# Altium PCB properpcb.PcbDoc
Units mil, origin at the board's own origin, x right, y up, seen from the top; angles counter-clockwise.
Board outline 1407.67 x 3602.55 mil, 2 copper layers (Top Layer, Bottom Layer); 28 components, 20 nets, 78 pads, 1 vias.
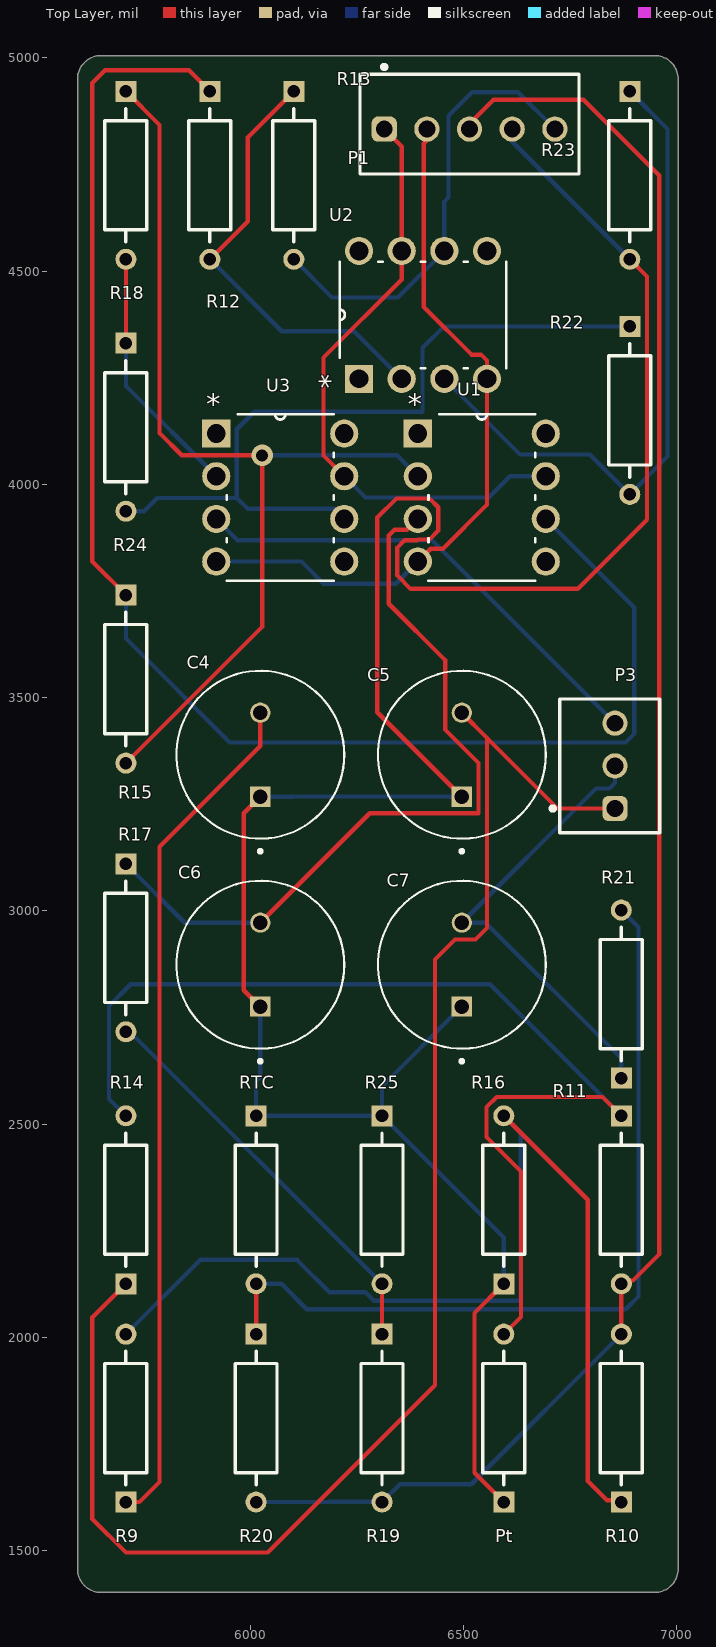
[diagram p0: Top Layer view]
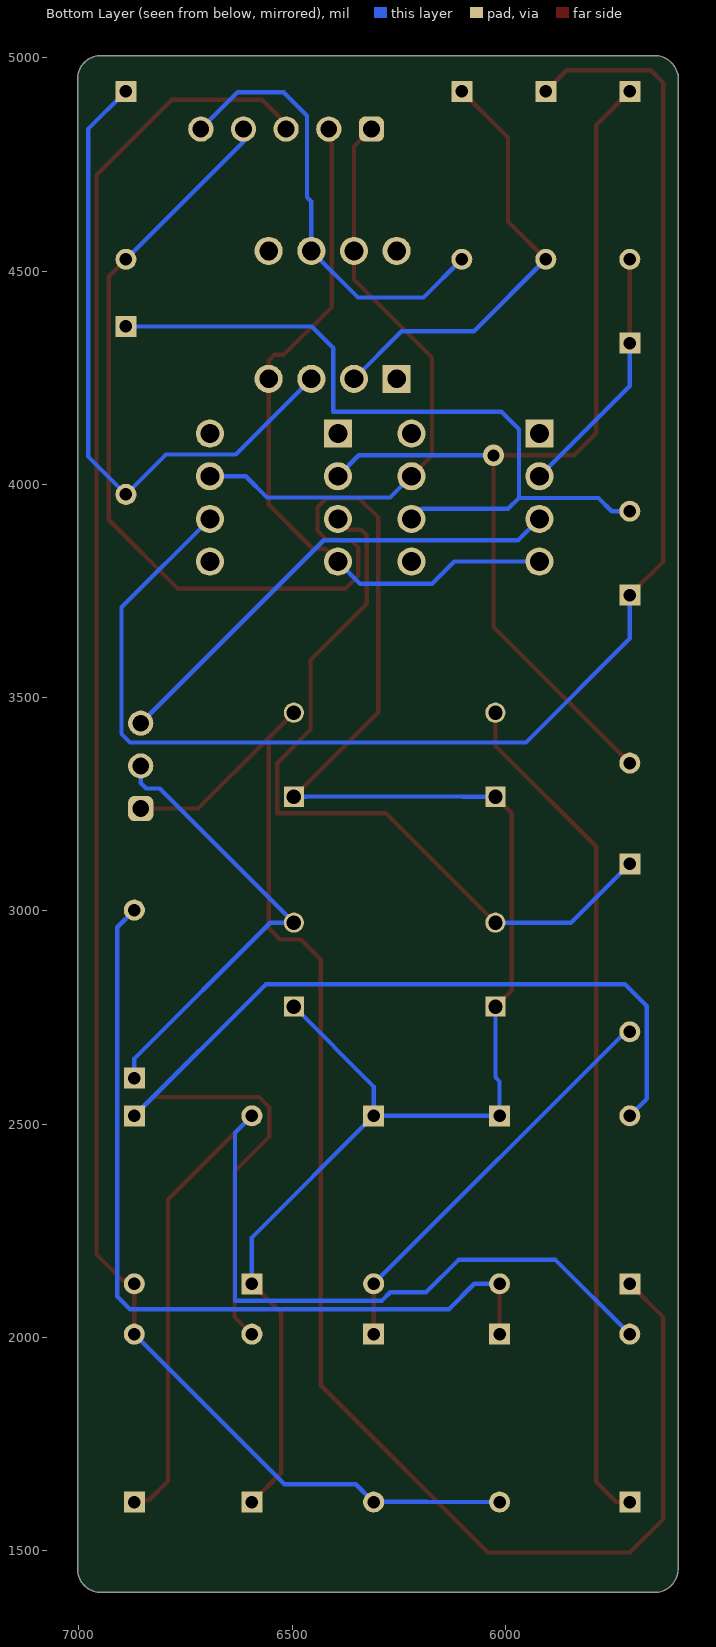
[diagram p1: Bottom Layer view, seen from below]
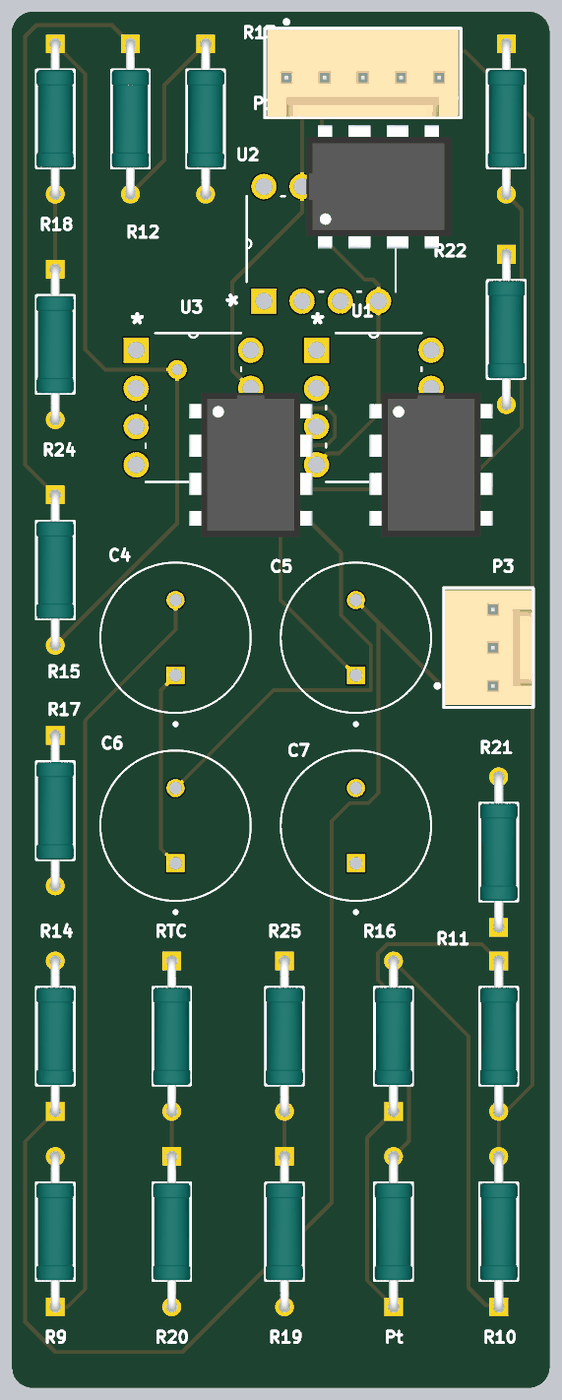
[diagram p2: 3D render of the assembled board from above, using the file's embedded part models]

## Layer stack, top to bottom
Top Solder: solder mask 0.4, Solder Resist, Dk 3.5
Top Layer: signal copper 1.4
Dielectric 1: dielectric 12.6, FR-4, Dk 4.8
Bottom Layer: signal copper 1.4
Bottom Solder: solder mask 0.4, Solder Resist, Dk 3.5

## Board outline
5595.38,1457.48 ccw(c5650.39,1457.48) 5650.39,1402.47 6948.03,1402.47 ccw(c6948.03,1457.48) 7003.05,1457.48 7003.05,4950 ccw(c6948.03,4950) 6948.03,5005.02 5650.39,5005.02 ccw(c5650.39,4950) 5597.36,4964.62 5595.38,4960.63

## Design rules (kind name [scope] priority, off if disabled: settings)
Clearance [All] p1: gap=10 ignorepadtopadclearanceinfootprint=FALSE
PolygonConnect [All] p1: connectstyle=Relief reliefconductorwidth=10 reliefentries=4 polygonreliefangle="90 Angle" airgapwidth=10
RoutingVias [All] p1: holewidth=28 width=50 viastyle="Through Hole" minholewidth=28 minwidth=50 maxholewidth=28 maxwidth=50
SolderMaskExpansion [All] p1: expansion=4 istentingtop=FALSE
Width [All] p1: maxlimit=10 minlimit=10 preferedwidth=10
30 further rules are at their usual default settings.

## Components (designator, comment, footprint, x,y, rotation, side; value= is the part's Value field where it differs from the comment)
C4 "10uF" CAPPRD500W60D1000H1700 6023.62,3366.14 r90 top
C5 "10uF" CAPPRD500W60D1000H1700 6496.06,3366.14 r90 top
C6 "10uF" CAPPRD500W60D1000H1700 6023.62,2874.02 r90 top
C7 "10uF" CAPPRD500W60D1000H1700 6496.06,2874.02 r90 top
P1 "61900511121" 61900511121 6514.17,4844.49 r180 top
P3 "61900311121" 61900311121 6843.19,3340 r270 top
Pt "10" FP-MRS25-MFG 6594.49,1811.02 r90 top
R9 "1k" FP-MRS25-MFG 5708.66,1811.02 r90 top
R10 "100" FP-MRS25-MFG 6870.08,1811.02 r90 top
R11 "100" FP-MRS25-MFG 6870.08,2322.83 r270 top
R12 "10k" FP-MRS25-MFG 5905.51,4724.41 r270 top
R13 "10k" FP-MRS25-MFG 6102.36,4724.41 r270 top
R14 "1k" FP-MRS25-MFG 5708.66,2322.83 r90 top
R15 "10k" FP-MRS25-MFG 5708.66,3543.31 r270 top
R16 "100" FP-MRS25-MFG 6594.49,2322.83 r90 top
R17 "1k" FP-MRS25-MFG 5708.66,2913.39 r270 top
R18 "6.6k" FP-MRS25-MFG 5708.66,4724.41 r270 top
R19 "10K" FP-MRS25-MFG 6309.06,1811.02 r270 top
R20 "10" FP-MRS25-MFG 6013.78,1811.02 r270 top
R21 "1k" FP-MRS25-MFG 6870,2805 r90 top
R22 "10k" FP-MRS25-MFG 6889.76,4173.23 r270 top
R23 "10k" FP-MRS25-MFG 6889.76,4724.41 r270 top
R24 "10k" FP-MRS25-MFG 5708.66,4133.86 r270 top
R25 "10K" FP-MRS25-MFG 6309.06,2322.83 r270 top
RTC "10K" FP-MRS25-MFG 6013.78,2322.83 r270 top
U1 "AD744KRZ-REEL7" DIP254P762X444-8 6692.91,3818.9 r0 top
U2 "AD744KRZ-REEL7" DIP254P762X444-8 6555.12,4547.24 r90 top
U3 "AD744KRZ-REEL7" DIP254P762X444-8 6220.47,3818.9 r0 top

## Footprints (in the part's own frame and the unit in brackets; to place one, negate y for a bottom-side part, rotate by r counter-clockwise, add the part's x,y. Pads: shape width x height; smd on the part's side, far side on the other; paste and mask are expansions set on the pad)
61900311121 [mm] "2.54mm Male Locking Header, 3p"
  rrect50% 1.5x1.5 hole 1: 1(2.54,0.3)
  round 1.5 hole 1: 2(0,0.3) 3(-2.54,0.3)
  silkscreen extent -3.98,-3.52 3.98,2.97, body extent -3.81,-2.9 3.81,2.9, height 11.53
61900511121 [mm] "2.54mm Male Locking Header, 5p"
  rrect50% 1.5x1.5 hole 1: 1(5.08,0.3)
  round 1.5 hole 1: 2(2.54,0.3) 3(0,0.3) 4(-2.54,0.3) 5(-5.08,0.3)
  silkscreen extent -6.52,-3.52 6.52,2.98, body extent -6.35,-2.9 6.35,2.9, height 11.53
CAPPRD500W60D1000H1700 [mm]
  rect 1.2x1.2 / inner round 1.2 / far side rect 1.2x1.2 hole 0.85: 1(-2.5,0)
  round 1.2 hole 0.85: 2(2.5,0)
  silkscreen extent -5.85,-5 5,5
DIP254P762X444-8 [mil]
  rect 66x66 / inner round 66 / far side rect 66x66 hole 44: 1(-300,300)
  round 66 hole 44: 2(-300,200) 3(-300,100) 4(-300,0) 5(0,0) 6(0,100) 7(0,200) 8(0,300)
  silkscreen extent -275,-45 -25,345, body extent -162,-189 162,189, height 210
FP-MRS25-MFG [mm]
  rect 1.25x1.25 hole 0.75 paste-2539.97 mask+0: 1(-5,0)
  round 1.25 hole 0.75 paste-2539.97 mask+0: 2(5,0)
  silkscreen extent -3.97,-1.25 3.97,1.25, body extent -5.72,-1.35 5.72,1.35, height 0.25

## Part data
C4 C5 C6 C7: library part B41858C5477M000, "470 ÂµF 25 V Aluminum Electrolytic Capacitors Radial, Can 118mOhm @ 10kHz 5000 Hrs @ 105Â°C", Package=None, Check_prices=https://www.snapeda.com/parts/B41858C5477M000/EPCOS/view-part/?ref=eda, MF=EPCOS, MP=B41858C5477M000, SnapEDA_Link=https://www.snapeda.com/parts/B41858C5477M000/EPCOS/view-part/?ref=snap
P1: library part CMP-1502-00587-2, Color=Beige, Contact Resistance=20mΩ, Current Rating=3A, Flammability Rating="UL94 V-0", Insulation Resistance=1GΩ, Max Operating Temperature=105°C, Min Operating Temperature=-40°C, Operating Supply Voltage=250V, Connector Type="Male Pin", Contact Gender=Male, Contact Material=Copper, Contact Mating Length=7.493mm, Contact Plating=Tin, Fastening Type=Friction, Gender=Male, Height=12.5mm, Housing Material=Nylon, Lead Free="Lead Free", Lead Pitch=2.54mm, Length=12.7mm, Mount="Through Hole", NexarPartId=18818230, Number of Contacts=5, Number of Pins=5, Number of Positions=5, Number of Rows=1, Orientation=Vertical, Packaging=Bulk, Pitch=2.54mm, REACH SVHC=Unknown, RoHS=Compliant, Termination="Through Hole", Voltage Rating=250V, Width=12.74mm
P3: library part CMP-1502-00585-2, Color=Beige, Contact Resistance=20mΩ, Current Rating=3A, Flammability Rating="UL94 V-0", Insulation Resistance=1GΩ, Max Operating Temperature=105°C, Min Operating Temperature=-40°C, Operating Supply Voltage=250V, Connector Type="Male Pin", Contact Gender=Male, Contact Material=Copper, Contact Mating Length=7.493mm, Contact Plating=Tin, Fastening Type=Friction, Gender=Male, Height=12.5mm, Housing Material=Nylon, Lead Pitch=2.54mm, Length=7.62mm, Mount="Through Hole", NexarPartId=18818222, Number of Contacts=3, Number of Pins=3, Number of Positions=3, Number of Rows=1, Orientation=Vertical, Packaging=Bulk, Pitch=2.54mm, REACH SVHC=Unknown, RoHS=Compliant, Termination="Through Hole", Voltage Rating=250V, Width=7.66mm
Pt R9 R10 R11 R12 R13 R14 R15 R16 R17 R18 R19 R20 R21 R22 R23 R24 R25 RTC: library part CMP-00030-42757237-1, "MRS25000C1000FRP00 Resistor, 100 Ohm, ± 1%, 600 mW, Axial Leaded, Metal Film (Thin Film), Professional", Case/Package=Axial, Max Operating Temperature=155°C, Max Power Dissipation=600mW, Min Operating Temperature=-55°C, Resistance=100Ω, Temperature Coefficient=50ppm/°C, Tolerance=1%, Voltage Rating=350V, Composition="Metal Film, Thin Film", Contact Plating=Tin, Diameter=2.5mm, Lead Diameter=600µm, Lead Free="Lead Free", Length=6.5mm, Military Standard=Not, Mount="Through Hole", NexarPartId=42757237, Number of Pins=2, Number of Terminations=2, Packaging="Tape & Reel (TR)", Power Rating=600mW, Radiation Hardening=No, REACH SVHC=Unknown, RoHS=Compliant, Schedule B="8533210090, 8533210090", Termination=Axial, Voltage Rating (DC)=350V, Width=2.5mm
U1 U2 U3: "Precision, 500 ns Settling BiFET Op Amp", Package=None, Availability=Unavailable, MP=AD744KRZ-REEL7, Price=None

## Via types
v1: diameter 50, hole 28, Top Layer to Bottom Layer, 1 vias

## Nets (pads, with @x,y where several pads share a name; then routed paths per layer and width w, separated by ;. In a path a pad name is that pad's centre, name@x,y a point inside that pad or via, vN(x,y) a via of type N, cw(c..) or ccw(c..) an arc to the next point about the centre after c; other vN are vias at no path point)
5V: P1.3 R10.2 R11.2 R19.2 R20.2 | length 4338.6
  Top Layer w10: P1.3 6514.17,4845.32 6570.43,4901.57 6781.5,4901.57 6958.66,4724.41 6958.66,2194.88 6897.27,2133.49 6877.58,2133.49 R11.2 R10.2
  Bottom Layer w10: R20.2 6183.17,1614.17 6184,1615 6308.23,1615 R19.2 6350.88,1656 6518.2,1656 R10.2
+VSS: P1.1 U1.7 U2.7 U3.7 | length 1440.4
  Top Layer w10: U3.7 6172,4067.37 6172,4297 6355.12,4480.12 U2.7 6355.12,4791.73 P1.1
  Bottom Layer w10: U3.7 6270.37,3969 6559.1,3969 6609,4018.9 U1.7
-VSS: P1.2 U1.4 U2.4 U3.4 | length 1690.5
  Top Layer w10: U1.4 6423.11,3849.1 6451.81,3849.1 6555.12,3952.41 U2.4 6555.12,4290 6541.12,4304 6519,4304 6407,4416 6407,4799 6414.17,4806.17 P1.2
  Bottom Layer w10: U3.4 6120.1,3818.9 6172,3767 6341.01,3767 U1.4
GND: C4.1 C5.1 C6.1 C7.1 P1.4 Pt.1 R16.1 R23.2 R25.1 RTC.1 | length 5817
  Top Layer w10: C6.1 5985,2814.21 5985,3229.09 C4.1 ; C5.1 6298,3465.78 6298,3922 6343,3967 6420,3967 6440.91,3946.09 6440.91,3891.81 6420,3870.9 6392.91,3870.9 6391.01,3869 6362,3869 6344.91,3851.91 6344.91,3786.09 6376,3755 6768,3755 6930,3917 6930,4487.32 R23.2 ; Pt.1 6525.59,1683.07 6525.59,2057.09 R16.1
  Bottom Layer w10: C6.1 6023.62,2610 6013.78,2600.16 RTC.1 R25.1 ; C4.1 6100.72,3267.72 6101,3268 6466.72,3268 6467,3267.72 C5.1 ; C7.1 6309.06,2588.58 R25.1 ; R16.1 6594.49,2234.25 R25.1 ; P1.4 6614.17,4803.15 R23.2
NetC4_2: C4.2 R9.1 | length 1999.3
  Top Layer w10: R9.1 5740.17,1614.17 5787.4,1661.4 5787.4,3150.46 6023.62,3386.68 C4.2
NetC5_2: C5.2 P3.1 R14.1 | length 3630.1
  Top Layer w10: R14.1 5629.92,2047.24 5629.92,1574.8 5708.66,1496.06 6041.06,1496.06 6433,1888 6433,2886 6480,2933 6528,2933 6555,2960 6555,3405.63 ; C5.2 6555,3405.63 ; P3.1 6720.63,3240 6555,3405.63
NetC6_2: C6.2 R17.1 U1.3 | length 1811.8
  Top Layer w10: C6.2 6280.18,3229 6535,3229 6535,3347 6457,3425 6457,3588 6324.91,3720.09 6324.91,3880 6338.28,3893.37 6367.38,3893.37 U1.3
  Bottom Layer w10: R17.1 5846.46,2972.44 C6.2
NetC7_2: C7.2 P3.2 R21.1 | length 1086.3
  Bottom Layer w10: P3.2 6855,3300 6842,3287 6810.62,3287 C7.2 6551.56,2972.44 6870,2654 R21.1
NetP1_5: P1.5 R13.2 U2.6 | length 1063.7
  Bottom Layer w10: R13.2 6191.92,4438 6345.87,4438 U2.6 6455.12,4663.12 6465,4673 6465,4864 6520,4919 6627.85,4919 P1.5
NetP3_3: P3.3 U3.3 | length 1132.9
  Bottom Layer w10: U3.3 5970.37,3869 6426,3869 P3.3
NetPt_2: Pt.2 R11.1 R14.2 | length 2550.5
  Top Layer w10: Pt.2 6635,2048.39 6635,2389 6554,2470 6554,2540 6578,2564 6825.76,2564 R11.1
  Bottom Layer w10: R14.2 5669,2559.35 5669,2777 5720,2828 6561.76,2828 R11.1
NetR9_2: R9.2 R10.1 R16.2 | length 2523.8
  Top Layer w10: R16.2 6791.34,2322.83 6791.34,1663.39 6836.33,1618.39 6865.86,1618.39 R10.1
  Bottom Layer w10: R9.2 5882.79,2182 6110,2182 6186,2106 6270,2106 6289.62,2086.38 6634.1,2086.38 6634.1,2480.08 R16.2
NetR12_1: R12.1 R15.1 U1.6 | length 3533.5
  Top Layer w10: R15.1 5629.92,3818.9 5629.92,4940.94 5659.45,4970.47 5856.3,4970.47 R12.1
  Bottom Layer w10: R15.1 5708.66,3638.34 5952,3395 6880,3395 6900,3415 6900,3711.81 U1.6
NetR12_2: R12.2 R13.1 U2.2 | length 1041
  Top Layer w10: R12.2 5994.09,4616.14 5994.09,4812.99 R13.1
  Bottom Layer w10: R12.2 6074.07,4359 6243.36,4359 U2.2
NetR15_2: R15.2 R18.1 U1.2 | length 2335.1
  Top Layer w10: R15.2 6028,3665.79 v1(6028,4068) 5839.4,4068 5787.4,4120 5787.4,4842.52 R18.1
  Bottom Layer w10: v1(6028,4068) 6343.81,4068 U1.2
NetR17_2: R17.2 R19.1 R25.2 | length 963.1
  Top Layer w10: R19.1 R25.2
  Bottom Layer w10: R17.2 5718.5,2716.54 R25.2
NetR18_2: R18.2 R24.1 U3.2 | length 596.4
  Top Layer w10: R24.1 R18.2
  Bottom Layer w10: R24.1 5708.66,4230.71 U3.2
NetR20_1: R20.1 R21.2 RTC.2 | length 1973.9
  Top Layer w10: R20.1 6014,2008.09 6014,2125.76 RTC.2
  Bottom Layer w10: RTC.2 6073.02,2125.98 6132.62,2066.38 6880.38,2066.38 6910,2096 6910,2961.85 R21.2
NetR22_1: R22.1 R24.2 U3.6 | length 1815
  Bottom Layer w10: R24.2 5751.01,3937.01 5782,3968 5968.47,3968 ; U3.6 6196.37,3943 5993.47,3943 5968.47,3968 ; R22.1 6454.08,4370.08 6404,4320 6404,4170 6009.47,4170 5968.47,4129 5968.47,3968
NetR22_2: R22.2 R23.1 U2.3 | length 1565.1
  Bottom Layer w10: U2.3 6632.36,4070 6796.14,4070 R22.2 6978.35,4064.96 6978.35,4832.68 R23.1
pads on no net: U1.1 U1.5 U1.8 U2.1 U2.5 U2.8 U3.1 U3.5 U3.8

## Silkscreen, mask and mechanical layers (free items; w line width, h text height)
Mechanical 1:
  lines w10: 5600.39,4950 cw(c5650.39,4950) 5650.39,5000 6948.03,5000 cw(c6948.03,4950) 6998.03,4950 6998.03,1457.48 cw(c6948.03,1457.48) 6948.03,1407.48 5659.45,1407.48 5650.39,1407.48 cw(c5650.39,1457.48) 5600.39,1457.48 5600.39,4960.63

## Text inside footprints (layer, text, board x,y; h text height)
U1: Top Overlay "*" at 6369.84,4162.97 h50.01; Mechanical 13 "*" at 6369.5,4163.34 h50.06
U2: Top Overlay "*" at 6211.04,4224.17 h50.01 r90; Mechanical 13 "*" at 6210.67,4223.83 h50.06 r90
U3: Top Overlay "*" at 5897.4,4162.97 h50.01; Mechanical 13 "*" at 5897.06,4163.34 h50.06